# Altium PCB FreeJoy Controller Lite.PcbDoc
Units mm, origin at the board's own origin, x right, y up, seen from the top; angles counter-clockwise.
Board outline 60 x 30 mm, 2 copper layers (Top Layer, Bottom Layer), stack 1.036 mm thick; 47 components, 50 nets, 225 pads, 77 vias.
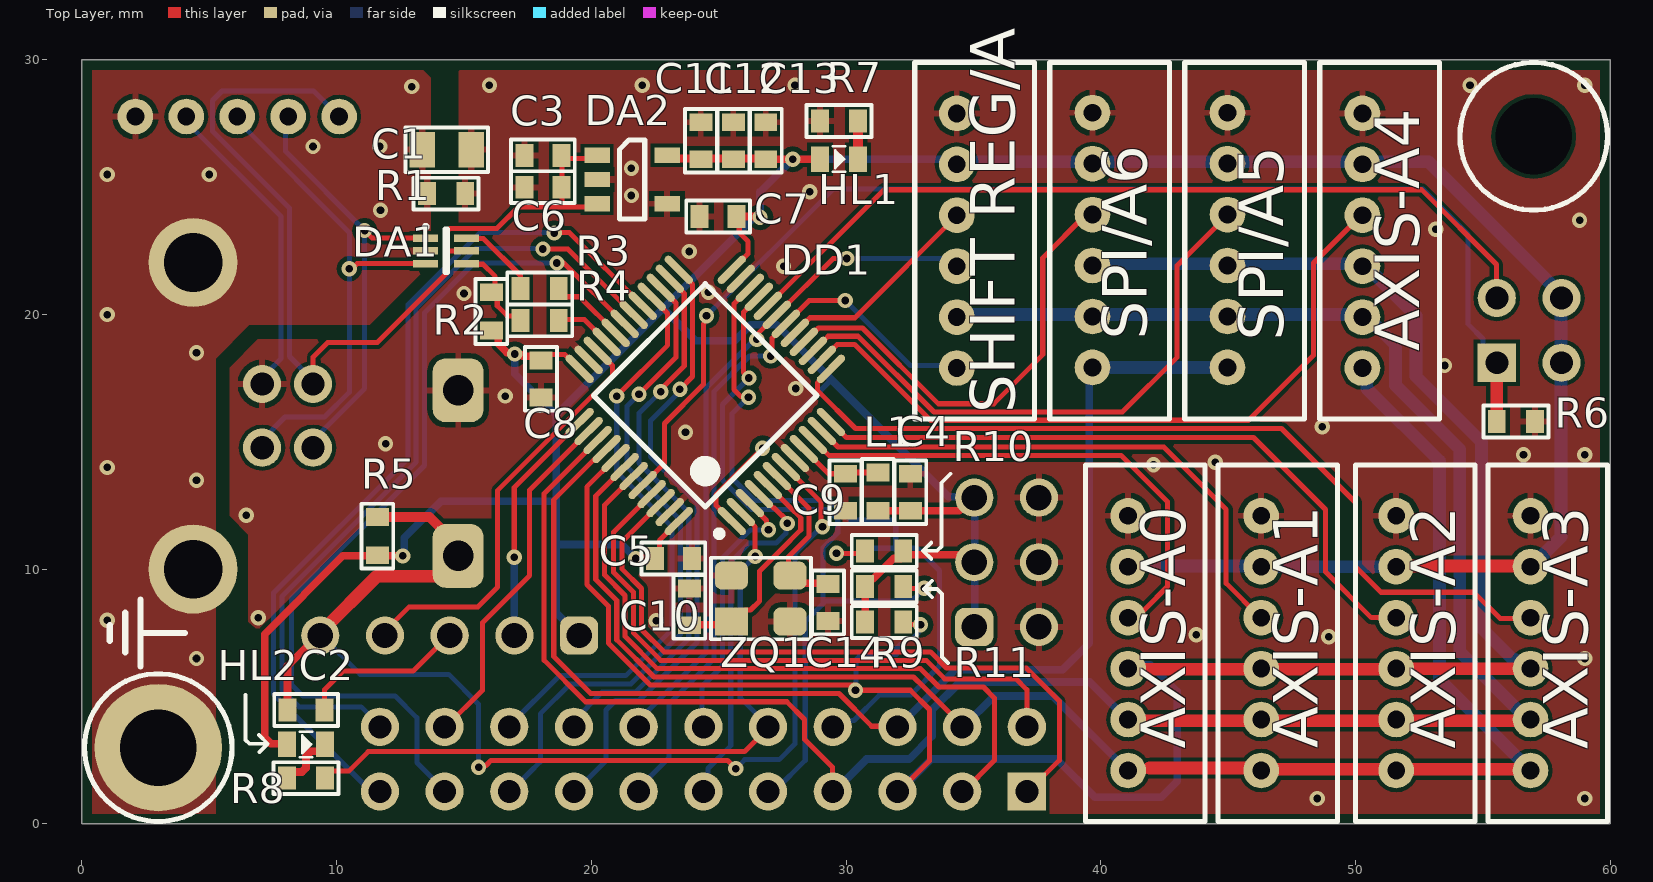
[diagram p0: Top Layer view]
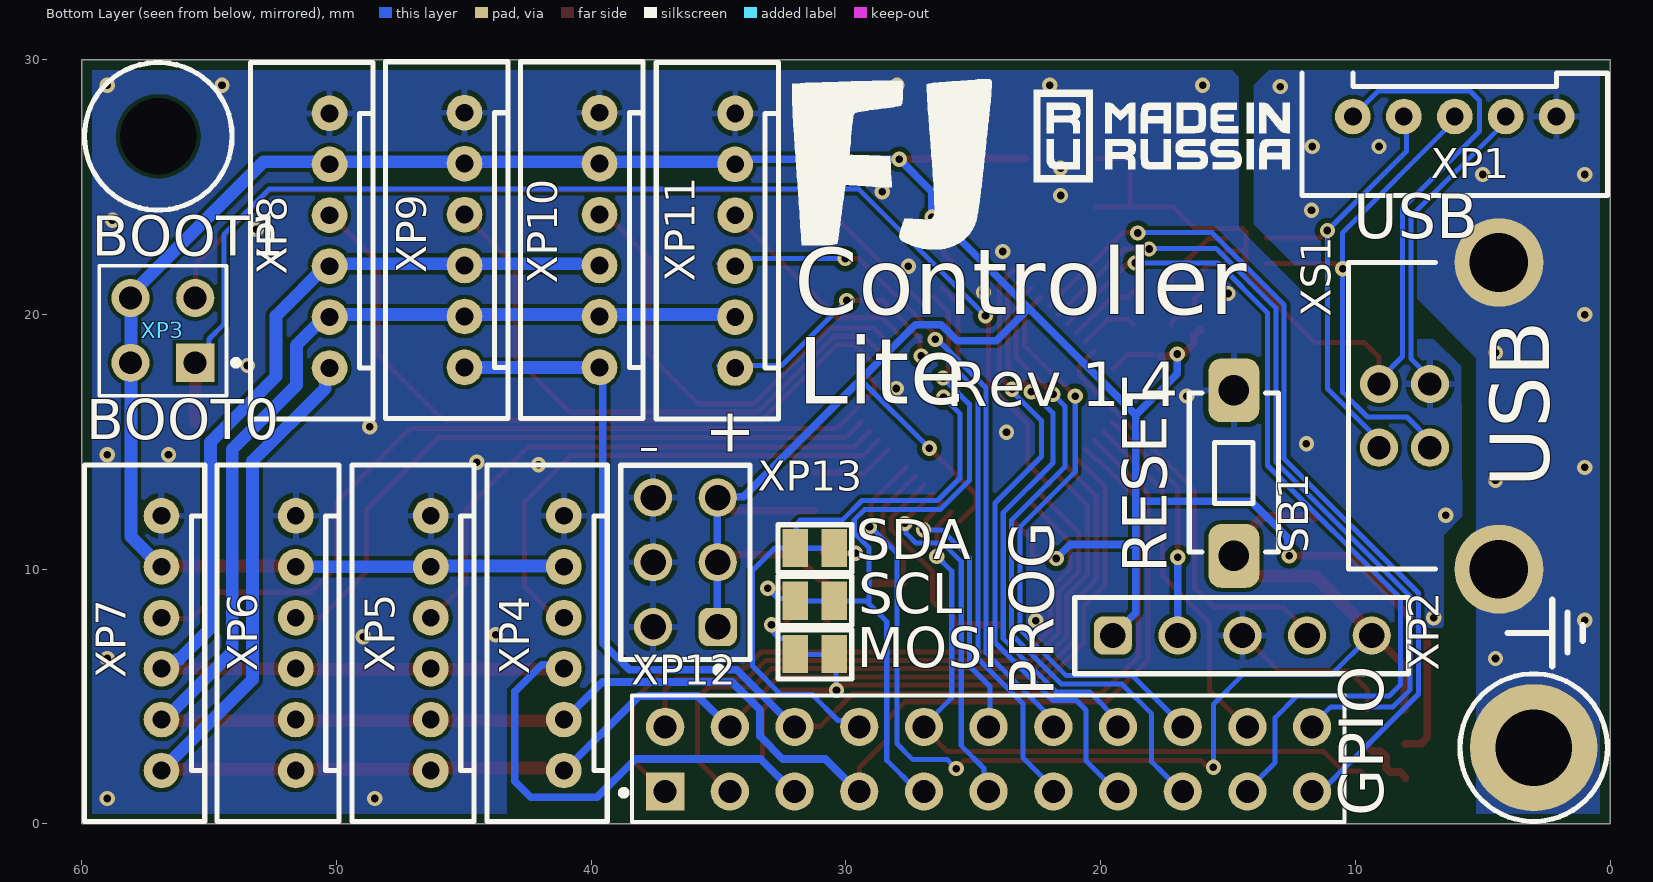
[diagram p1: Bottom Layer view, seen from below]

## Layer stack, top to bottom
Top Solder: solder mask 0.0254, SM-001, Dk 4
Top Layer: signal copper 0.018
Dielectric 1: core 1, Core-043, Dk 4.3
Bottom Layer: signal copper 0.018
Bottom Solder: solder mask 0.0254, SM-001, Dk 4

## Board outline
0,0 60,0 60,30 0,30

## Design rules (kind name [scope] priority, off if disabled: settings)
BoardOutlineClearance BoardOutlineClearance_Silk [OnLayer('Top Overlay')  or OnLayer('Bottom Overlay')] p1: gap=0 ignorepadtopadclearanceinfootprint=FALSE
BoardOutlineClearance [All] p2: gap=0.4 ignorepadtopadclearanceinfootprint=FALSE
Clearance [All] p1: gap=0.125 ignorepadtopadclearanceinfootprint=FALSE except(0: Arc-Hole Track-Hole SMDPad-Hole THPad-Hole Via-Hole Fill-Hole Poly-Hole Region-Hole Text-Hole; 0.15: Arc-Poly Track-Poly SMDPad-Poly THPad-Poly Fill-Poly Poly-Poly; 0.2: Arc-Arc Arc-Track Arc-SMDPad Arc-THPad Arc-Via Arc-Fill Arc-Region Arc-Text Via-Poly)
ComponentClearance [All] p1: gap=-0.05 collisioncheckmode=3 verticalgap=0.1 showdistances=FALSE
DiffPairsRouting [All] p1: maxlimit=0.15 minlimit=0.125 mostfreqgap=0.125 toplayer_minwidth=0.125 toplayer_maxwidth=1.2 toplayer_prefwidth=0.125 bottomlayer_minwidth=0.125 bottomlayer_maxwidth=1.2 bottomlayer_prefwidth=0.125 maxuncoupledlength=12.7
Height [All] p1: minheight=0 maxheight=50 prefheight=10
HoleSize [All] p1: absolutevalues=TRUE maxlimit=5 minlimit=0.3 maxpercent=80.000 minpercent=20.000
HoleToHoleClearance [All] p1: gap=0.3 allowstackedmicrovias=TRUE
MinimumAnnularRing AnnularRingVia [IsVia] p1: minimumring=0.15
MinimumAnnularRing [All] p2: minimumring=0.2
MinimumSolderMaskSliver [All] p1: minsoldermaskwidth=0.05
PlaneClearance [All] p1: clearance=0.4
PlaneConnect [All] p1: planeconnectstyle=Relief reliefexpansion=0.4 reliefentries=4 reliefconductorwidth=0.2 reliefairgap=0.2
PolygonConnect PolygonConnectMountingHole [IsPad and HoleDiameter>=2] p1: connectstyle=Direct reliefconductorwidth=0.254 reliefentries=4 polygonreliefangle="90 Angle" airgapwidth=0.254
PolygonConnect PolygonConnectVia [All vs IsVia] p2: connectstyle=Direct reliefconductorwidth=0.2 reliefentries=4 polygonreliefangle="90 Angle" airgapwidth=0.2
PolygonConnect [All] p3: connectstyle=Relief reliefconductorwidth=0.25 reliefentries=4 polygonreliefangle="90 Angle" airgapwidth=0.2
RoutingVias [All] p1: holewidth=0.3 width=0.6 viastyle="Through Hole" minholewidth=0.3 minwidth=0.6 maxholewidth=2 maxwidth=3
SilkToSilkClearance [All] p1: silktosilkclearance=0
SilkToSolderMaskClearance [IsPad] p1: minsilkscreentomaskgap=0.001 clearancetoexposedcopper=FALSE
SolderMaskExpansion SolderMaskExpansion_isVia [IsVia] p1: expansion=0.102 istentingtop=TRUE
SolderMaskExpansion [All] p2: expansion=0.05 istentingtop=FALSE
Width [All] p1: maxlimit=5 minlimit=0.125 preferedwidth=0.2 minimp=50.000000 maximp=50.000000 favimp=50.000000
Width Width_Arc [IsArc] p2: maxlimit=5 minlimit=0.2 preferedwidth=0.2 minimp=50.000000 maximp=50.000000 favimp=50.000000
20 further rules are at their usual default settings.

## Components (designator, comment, footprint, x,y, rotation, side; value= is the part's Value field where it differs from the comment)
C1 "4.7nF 250V" CC0805_HD 14.325,26.475 r180 top value="Конденсатор 0805 250 В 4,7 нФ ±10% X7R"
C2 "100nF" CC0603_HD 8.8,4.475 r180 top value=0,1uF
C3 "1uF" CC0603_HD 18.1,26.25 r0 top value="Конденсатор 0603 6,3 В 1 мкФ ±10% X5R"
C4 "1uF" CC0603_HD 32.525,13.025 r90 top value="Конденсатор 0603 6,3 В 1 мкФ ±10% X5R"
C5 "100nF" CC0603_HD 23.225,10.425 r180 top value=0,1uF
C6 "100nF" CC0603_HD 18.1,25 r0 top value=0,1uF
C7 "100nF" CC0603_HD 24.975,23.85 r0 top value=0,1uF
C8 "100nF" CC0603_HD 18.025,17.475 r90 top value=0,1uF
C9 "100nF" CC0603_HD 29.975,13.025 r270 top value=0,1uF
C10 "22pF" CC0603_HD 23.85,8.525 r270 top value="Конденсатор 0603 50В 22 пФ ±5% NP0"
C11 "1uF" CC0603_HD 24.3,26.825 r270 top value="Конденсатор 0603 6,3 В 1 мкФ ±10% X5R"
C12 "100nF" CC0603_HD 25.575,26.825 r270 top value=0,1uF
C13 "22pF" CC0603_HD 26.85,26.825 r270 top value="Конденсатор 0603 50В 22 пФ ±5% NP0"
C14 "22pF" CC0603_HD 29.3,8.7 r90 top value="Конденсатор 0603 50В 22 пФ ±5% NP0"
DA1 "USBLC6-2P6" SOT666 14.3,22.5 r0 top value="Диодная сборка USBLC6-2SC6"
DA2 "LP5907MFX-3.3" SOT23-5 21.6,25.3 r0 top
DD1 "STM32F103C8T6" LQFP48 24.475,16.825 r135 top
HL1 "KP-1608SRC" LED0603R_HD 28.925,26.1 r0 top value="Светодиод KP-1608SRC"
HL2 "KP-1608SGC" LED0603G_HD 8,3.125 r0 top value="Светодиод KP-1608SGC"
L1 "Ferrite bead, BLM18HG102SN1D" RC0603_HD 31.25,13.05 r90 top
R1 "1M" RC0603_HD 14.3,24.75 r180 top value="Резистор 0603"
R2 "1K5" RC0603_HD 16.075,20.125 r270 top value="Резистор 0603"
R3 "27R" RC0603_HD 17.975,21.025 r0 top value="Резистор 0603"
R4 "27R" RC0603_HD 17.975,19.775 r0 top value="Резистор 0603"
R5 "4K7" RC0603_HD 11.6,11.3 r90 top value="Резистор 0603"
R6 "4K7" RC0603_HD 56.3,15.8 r0 top value="Резистор 0603"
R7 "4K7" RC0603_HD 29.725,27.6 r180 top value="Резистор 0603"
R8 "4K7" RC0603_HD 8.8,1.8 r180 top value="Резистор 0603"
R9 "1К" RC0603_HD 31.5,7.925 r180 top value="Резистор 0603"
R10 "4K7" RC0603_HD 31.5,10.725 r180 top value="Резистор 0603"
R11 "4K7" RC0603_HD 31.5,9.325 r0 top value="Резистор 0603"
SB1 "Tact Switch 3.5x6mm THT" DTS-32 14.775,13.775 r270 bottom
XP1 "USB PH2.0-5P" PH2.0-5P 10.1,27.775 r180 bottom value="Гнездо PBS-12"
XP2 "PROG" PLS-5 19.52,7.4 r180 bottom value="Вилка PLS-10"
XP3 "BOOT" PLD-4 55.55,18.11 r90 bottom value="Вилка PLD-4"
XP4 "AXIS-A0" PH2.0-6P 41.075,12.1 r270 bottom value="Гнездо PBS-12"
XP5 "AXIS-A1" PH2.0-6P 46.3,12.1 r270 bottom value="Гнездо PBS-12"
XP6 "AXIS-A2" PH2.0-6P 51.6,12.1 r270 bottom value="Гнездо PBS-12"
XP7 "AXIS-A3" PH2.0-6P 56.875,12.1 r270 bottom value="Гнездо PBS-12"
XP8 "AXIS-A4" PH2.0-6P 50.275,27.9 r270 bottom value="Гнездо PBS-12"
XP9 "SPI/A5" PH2.0-6P 44.975,27.925 r270 bottom value="Гнездо PBS-12"
XP10 "SPI/A6" PH2.0-6P 39.675,27.925 r270 bottom value="Гнездо PBS-12"
XP11 "SHIFT REG/A7" PH2.0-6P 34.35,27.9 r270 bottom value="Гнездо PBS-12"
XP12 "GPIO" PLD-22 37.1,1.275 r180 bottom value="Вилка PLD-22"
XP13 "SUPPLY" PLD-6 35.035,7.735 r90 bottom value="Вилка PLD-6"
XS1 "USB Type B" DS1099-B 4.365,10.005 r90 bottom
ZQ1 "KX-7T 8MHz" CRYSTAL_3225 26.65,8.85 r0 top value="Кварцевый резонатор MJ-8.000-12"

## Footprints (in the part's own frame and the unit in brackets; to place one, negate y for a bottom-side part, rotate by r counter-clockwise, add the part's x,y. Pads: shape width x height; smd on the part's side, far side on the other; paste and mask are expansions set on the pad)
CC0603_HD [mm]
  rect 0.7x0.9 smd: 1(-0.725,0) 2(0.725,0)
  silkscreen extent -1.25,-0.63 1.25,0.63, body extent -0.82,-0.4 0.78,0.4, height 0.8
CC0805_HD [mm]
  rect 1x1.4 smd: 1(-0.965,0) 2(0.965,0)
  silkscreen extent -1.63,-0.87 1.63,0.87, body extent -1,-0.62 1,0.63, height 0.6
CRYSTAL_3225 [mm]
  rect 1.3x1.1 smd: 1(-1.15,-0.9)
  rrect50% 1.3x1.1 smd: 2(1.15,0.9) 3(-1.15,0.9) 3(1.15,-0.9)
  silkscreen extent -1.95,-1.6 1.97,1.6, body extent -1.6,-1.2 1.6,1.3, height 0.6
DS1099-B [mm] "USB Type B socket"
  round 1.5 hole 0.92: 1(7.27,4.71) 2(4.77,4.71) 3(4.77,2.71) 4(7.27,2.71)
  round 3.5 hole 2.3: 5(0,0) 5(12.04,0)
  silkscreen extent 0,2.5 12.04,5.9, body extent -1.39,-10.2 13.39,5.9, height 10.76
DTS-32 [mm]
  rrect50% 2.5x2 hole 1.2: 1(-3.25,0) 2(3.25,0)
  silkscreen extent -3.15,-1.75 3.1,1.75, body extent -3.88,-1.75 3.88,1.75, height 5
LED0603G_HD [mm]
  rect 0.7x1 smd: A(0.05,0) C(1.55,0)
  silkscreen extent 0.55,-0.5 1.05,0.5, body extent 0,-0.4 1.6,0.4, height 0.6
LED0603R_HD [mm]
  rect 0.7x1 smd: A(0.05,0) C(1.55,0)
  silkscreen extent 0.55,-0.5 1.05,0.5, body extent 0,-0.4 1.6,0.4, height 0.6
LQFP48 [mm] "TSQFP, 48-Leads, Body 7,00x7,00mm, Pitch 0,50mm, IPC Medium Density"
  oval 1.45x0.3 smd: 1(-4.225,2.75) 2(-4.225,2.25) 3(-4.225,1.75) 4(-4.225,1.25) 5(-4.225,0.75) 6(-4.225,0.25) 7(-4.225,-0.25) 8(-4.225,-0.75) 9(-4.225,-1.25) 10(-4.225,-1.75) 11(-4.225,-2.25) 12(-4.225,-2.75) 25(4.225,-2.75) 26(4.225,-2.25) 27(4.225,-1.75) 28(4.225,-1.25) 29(4.225,-0.75) 30(4.225,-0.25) 31(4.225,0.25) 32(4.225,0.75) 33(4.225,1.25) 34(4.225,1.75) 35(4.225,2.25) 36(4.225,2.75)
  oval 0.3x1.45 smd: 13(-2.75,-4.225) 14(-2.25,-4.225) 15(-1.75,-4.225) 16(-1.25,-4.225) 17(-0.75,-4.225) 18(-0.25,-4.225) 19(0.25,-4.225) 20(0.75,-4.225) 21(1.25,-4.225) 22(1.75,-4.225) 23(2.25,-4.225) 24(2.75,-4.225) 37(2.75,4.225) 38(2.25,4.225) 39(1.75,4.225) 40(1.25,4.225) 41(0.75,4.225) 42(0.25,4.225) 43(-0.25,4.225) 44(-0.75,4.225) 45(-1.25,4.225) 46(-1.75,4.225) 47(-2.25,4.225) 48(-2.75,4.225)
  silkscreen extent -4.35,-3.1 3.1,3.57, body extent -4.5,-4.5 4.5,4.5, height 1.6
PH2.0-5P [mm]
  round 1.4 hole 0.7: 1(0,0) 2(2,0) 3(4,0) 4(6,0) 5(8,0)
  silkscreen extent -2,-3.1 10,1.7, body extent -2,-3.1 10,1.7, height 6
PH2.0-6P [mm]
  round 1.4 hole 0.7: 1(0,0) 2(2,0) 3(4,0) 4(6,0) 5(8,0) 6(10,0)
  silkscreen extent -2,-3.02 12,1.7, body extent -2,-3.1 12,1.7, height 6
PLD-4 [mm]
  rect 1.5x1.5 hole 0.9: 1(0,0)
  round 1.5 hole 0.9: 2(0,2.54) 3(2.54,0) 4(2.54,2.54)
  silkscreen extent -1.3,-1.7 3.81,3.77, body extent -1.27,-1.25 3.81,3.75, height 8.4
PLD-6 [mm]
  rrect50% 1.5x1.5 hole 1: 1(0,0)
  round 1.5 hole 1: 2(0,2.54) 3(2.54,0) 4(2.54,2.54) 5(5.08,0) 6(5.08,2.54)
  silkscreen extent -1.78,-1.27 6.35,3.81, body extent -1.27,-1.23 6.35,3.77, height 8.6
PLD-22 [mm]
  rect 1.5x1.5 hole 0.9: 1(0,0)
  round 1.5 hole 0.9: 2(0,2.54) 3(2.54,0) 4(2.54,2.54) 5(5.08,0) 6(5.08,2.54) 7(7.62,0) 8(7.62,2.54) 9(10.16,0) 10(10.16,2.54) 11(12.7,0) 12(12.7,2.54) 13(15.24,0) 14(15.24,2.54) 15(17.78,0) 16(17.78,2.54) 17(20.32,0) 18(20.32,2.54) 19(22.86,0) 20(22.86,2.54) 21(25.4,0) 22(25.4,2.54)
  silkscreen extent -1.73,-1.2 26.67,3.77, body extent -1.27,-1.2 26.67,3.8, height 8.4
PLS-5 [mm]
  rrect50% 1.5x1.5 hole 1: 1(0,0)
  round 1.5 hole 1: 2(2.54,0) 3(5.08,0) 4(7.62,0) 5(10.16,0)
  silkscreen extent -1.5,-1.5 11.6,1.5, body extent -1.27,-1.27 11.43,1.27, height 8.44
RC0603_HD [mm]
  rect 0.7x0.9 smd: 1(-0.75,0) 2(0.75,0)
  silkscreen extent -1.28,-0.63 1.28,0.63, body extent -0.8,-0.4 0.8,0.4, height 0.45
SOT23-5 [mm]
  rect 1x0.6 smd: 1(-1.375,0.95) 2(-1.375,0) 3(-1.375,-0.95) 4(1.375,-0.95) 5(1.375,0.95)
  silkscreen extent -0.5,-1.55 0.5,1.55, body extent -1.27,-1.5 1.23,1.5, height 1.05
SOT666 [mm] "SOTFL, 6-Leads, Body 1.60x1.60mm, Pitch 0.50mm, IPC High Density"
  rect 0.99x0.3 smd: 1(-0.805,0.5) 2(-0.805,0) 3(-0.805,-0.5) 4(0.805,-0.5) 5(0.805,0) 6(0.805,0.5)
  silkscreen extent -0.85,-0.85 0.05,1, body extent -0.8,-0.8 0.8,0.8, height 0.6

## Part data
C1: library part "Конденсатор 0805 250 В 4,7 нФ ±10% X7R", "4700pF ± 5%, 250V, X7R, SMD 0805"
C2 C5 C6 C7 C8 C9 C12: library part "Конденсатор 0603 50 В 0,1 мкФ ±10% X7R", "0.1uF ± 10%, 25V, X7R, SMD 0603"
C3 C4 C11: library part "Конденсатор 0603 16 В 1 мкФ ±10% X7R", "1uF ± 10%, 16V, X7R, SMD 0603"
C10 C13 C14: library part "Конденсатор 0603 50В 22 пФ ±5% NP0", "22pF ± 5%, 50V, NPO, SMD 0603"
DA1: library part "Диодная сборка USBLC6-2P6", "ESR protection IC, USBLC6-2P6, SOT666"
DA2: library part "Микросхема LP5907MFX-3.3", "LDO voltage regulator, LP5907MFX-3.3, SOT23-5"
DD1: library part "Микросхема STM32F103C8T6", "MCU, STM32F103C8T6, LQFP48"
HL1: library part "Светодиод KP-1608SRC", "KP-1608SRC, LED red, SMD 0603"
HL2: library part "Светодиод KP-1608SGC", "KP-1608SGC, LED green, SMD 0603"
L1: library part "Индуктивность BLM18HG102SN1D", "BLM18HG102SN1D, SMD 0603"
R1: library part "Резистор RC0603FR-071ML", "1M ± 1%, SMD 0603"
R2: library part "Резистор RC0603FR-071K5L", "1K5 ± 1%, SMD 0603"
R3 R4: library part "Резистор RC0603FR-0727RL", "27R ± 1%, SMD 0603"
R5 R6 R7 R8 R10 R11: library part "Резистор RC0603FR-074K7L", "4K7 ± 1%, SMD 0603"
R9: library part "Резистор RC0603FR-071KL", "1K ± 1%, SMD 0603"
SB1: library part "Кнопка DTS-32", "DTS-32, 3.5x6mm, THT"
XP1: library part "Вилка PH2.0-5P", "PH2.0-5P"
XP2: library part "Вилка DS1021-1x5", "PLS-5"
XP3: library part "Вилка DS1021-2x2", "PLD-4"
XP4 XP5 XP6 XP7 XP8 XP9 XP10 XP11: library part "Вилка PH2.0-6P", "PH2.0-6P"
XP12: library part "Вилка DS1021-2x11", "PLD-22"
XP13: library part "Вилка DS1021-2x3", "PLD-6"
XS1: library part "Гнездо DS1099", "DS1099, USB Type B Socket"
ZQ1: library part "Кварцевый резонатор KX-7T 8 МГц", "Crystal Resonator, 8MHz, KX-7T"

## Free pads (board coordinates)
  round 5 hole 3: ""(3,3)
  rect 1x1.5 smd far side: ""(30.463,6.675) ""(30.463,8.762) ""(30.463,10.838) ""(31.988,6.675) ""(31.988,8.762) ""(31.988,10.838)
  round 1.4 hole 3 unplated: ""(57,27)

## Via types
v1: diameter 0.6, hole 0.3, Top Layer to Bottom Layer, tented both sides, 77 vias

## Nets (pads, with @x,y where several pads share a name; then routed paths per layer and width w, separated by ;. In a path a pad name is that pad's centre, name@x,y a point inside that pad or via, vN(x,y) a via of type N, cw(c..) or ccw(c..) an arc to the next point about the centre after c; other vN are vias at no path point)
3V3: C4.1 C5.2 C7.2 C8.2 C11.2 C12.2 C13.2 DA2.5 DD1.1 DD1.24 DD1.36 DD1.48 HL1.A HL2.A L1.1 R2.2 R5.1 R9.2 R10.1 R11.1 XP2.1 XP3.2 XP3.4 XP4.2 XP5.2 XP6.2 XP7.2 XP8.2 XP9.2 XP10.2 XP11.2 XP13.1 XP13.3 XP13.5 | length 163.2
  Top Layer w0.2: C8.2@17.975,18.425 18.969,18.425 19.526,17.868 DD1.36 ; C5.2@22.675,10.425 22.675,11.136 DD1.48 ; DD1.1 24.9,12.511 24.9,12.924 v1(26.725,14.75) ; DD1.24 26.15,22.389 26.15,22.875 25.808,23.217 25.808,23.742 C7.2
  Top Layer w0.3: HL2.A 8.026,3.149 7.426,3.149 7.175,3.4 7.175,7.45 10.25,10.525 v1(12.6,10.525) ; R2.2 16.15,19.375 16.35,19.175 16.35,18.85 16.693,18.507 ; v1(17,18.45) 17.025,18.425 17.263,18.425 17.319,18.369 C8.2@17.681,18.369 ; v1(21.75,10.425) C5.2@22.675,10.425 ; DA2.5@22.975,26.125 26.825,26.125 C13.2 v1(27.912,26.1) HL1.A ; C7.2 26.6,23.85 v1(26.625,23.825) ; R9.2 R11.1 30.75,9.425 30.95,9.625 31.075,9.625 31.875,10.425 32.15,10.425 R10.1@32.225,10.5 ; L1.1 C4.1 34.45,12.3 34.965,12.815 XP13.5 XP13.5@35.16,12.815 ; R10.1 32.4,10.575 34.41,10.575 34.481,10.505 34.78,10.505 XP13.3@34.85,10.575 ; XP13.3@34.805,10.045 XP13.3
  Top Layer w0.5: XP13.1@34.67,8.1 XP13.1 ; XP6.2@51.502,10.125 56.85,10.125 XP7.2 ; XP3.2@57.95,18.225 XP3.2@58.075,18.35
  Bottom Layer w0.2: v1(26.725,14.75) 29.388,17.413 29.463,17.413
  Bottom Layer w0.3: v1(12.6,10.525) 12.657,10.582 12.657,11.232 14.1,12.675 18.625,12.675 ; v1(17,18.45) 17,17.683 18.625,16.058 ; XP2.1 18.625,8.295 18.625,10.975 ; v1(21.75,10.425) 21.2,10.975 18.625,10.975 ; XP11.2@35,26 34.9,26.1 v1(27.912,26.1) 27.9,26.1 26.625,24.825 v1(26.625,23.825) 26.568,23.768 26.335,23.768 22.821,20.254 ; XP13.1 35.05,7.75 35.05,10.26 XP13.3 35.05,10.29 35.05,12.8 XP13.5 35,12.85 34.025,12.85 29.463,17.413 27.275,19.6 26.262,19.6 25.637,18.975 24.1,18.975 22.821,20.254 ; 18.625,10.975 18.625,12.675 ; 18.625,12.675 18.625,16.058 ; 18.625,16.058 22.821,20.254
  Bottom Layer w0.5: XP11.2@35,26 39.675,26 44.975,26 50.275,26 52.875,26 57.985,20.89 58.075,20.89 58.075,18.11 58.075,11.275 56.9,10.1 XP7.2 ; XP4.2@41.678,10.125 46.275,10.125 XP5.2 XP6.2
A0: DD1.10 XP4.3 | length 20.4
  Top Layer w0.2: DD1.10 28.727,15.075 29.327,14.475 40.8,14.475 42.625,12.65 42.625,9.325 41.745,8.445 41.35,8.05 XP4.3@41,8.05
A1: DD1.11 XP5.3 | length 22
  Top Layer w0.2: DD1.11 29.682,14.8 42.475,14.8 44.925,12.35 44.925,9.45 46.275,8.1 XP5.3
A2: DD1.12 XP6.3 | length 26.8
  Top Layer w0.2: DD1.12 30.014,15.175 46,15.175 48.825,12.35 48.825,9.9 50.625,8.1 XP6.3
A3: DD1.13 XP7.3 | length 34.3
  Top Layer w0.2: DD1.13 29.407,17.841 28.875,17.309 28.875,17.025 30.375,15.525 47.1,15.525 50,12.625 50,10.1 51,9.1 54.65,9.1 55.675,8.075 56.85,8.075 XP7.3
A4: DD1.14 XP8.3 | length 28.3
  Top Layer w0.2: DD1.14 29.657,18.825 30.34,18.825 33.315,15.85 45.8,15.85 48.35,18.4 48.35,22.025 XP8.3@50.375,24.05
A5: DD1.15 XP9.3 | length 23.1
  Top Layer w0.2: DD1.15 28.727,18.575 29.302,19.15 30.475,19.15 33.45,16.175 40.85,16.175 43,18.325 43,21.925 44.975,23.9 XP9.3
A6: DD1.16 XP10.3 | length 18.1
  Top Layer w0.2: DD1.16 28.373,18.929 28.92,19.475 30.65,19.475 33.625,16.5 35.8,16.5 37.725,18.425 37.725,22.225 39.425,23.925 XP10.3
A7: DD1.17 XP11.3 | length 8.4
  Top Layer w0.2: DD1.17 28.586,19.875 30.35,19.875 XP11.3@34.45,23.975
A8: DD1.29 XP12.21 | length 34.9
  Top Layer w0.2: v1(18.551,23.201) 18.575,23.225 19.136,23.225 DD1.29
  Bottom Layer w0.2: XP12.21@11.75,1.275 11.35,1.275 7.525,5.1 7.525,9.069 12.8,14.344 12.8,20.385 15.64,23.225 18.527,23.225 v1(18.551,23.201)
A9: DD1.30 XP12.22 | length 32.3
  Top Layer w0.2: v1(18.101,22.576) 19.077,22.576 DD1.30
  Bottom Layer w0.2: XP12.22@11.75,3.815 10.965,4.6 8.525,4.6 7.85,5.275 7.85,8.935 13.125,14.21 13.125,20.25 15.475,22.6 18.077,22.6 v1(18.101,22.576)
A10: DD1.31 XP12.19 | length 35.3
  Top Layer w0.2: v1(18.65,22.025) 18.921,22.025 DD1.31
  Bottom Layer w0.2: XP12.19@14.29,1.275 13.15,2.415 13.15,4.175 12.3,5.025 8.675,5.025 8.225,5.475 8.225,8.85 13.45,14.075 13.45,20.075 15.4,22.025 v1(18.65,22.025)
A15: DD1.38 XP12.20 | length 13.9
  Top Layer w0.2: XP12.20@14.29,3.815 15.725,5.25 15.725,7.9 17.575,9.75 17.575,13.107 DD1.38
B0: DD1.18 XP11.6 XP12.13 | length 30
  Top Layer w0.2: v1(27.05,18.375) 27.1,18.425 27.1,19.069 27.639,19.609 DD1.18 28.554,20.55 v1(29.975,20.55)
  Bottom Layer w0.2: XP12.13@21.8,1.35 22.525,2.075 23.05,2.6 23.05,4.725 24.825,6.5 24.825,16.985 26.215,18.375 v1(27.05,18.375) ; v1(29.975,20.55) 32.525,18 XP11.6@35,18
B1: DD1.19 XP11.4 XP12.14 | length 26.9
  Top Layer w0.2: v1@26.5,19.204 DD1.19 29.496,22.2 v1(30.025,22.2)
  Bottom Layer w0.2: XP12.14@21.9,3.9 21.9,4.125 24.5,6.725 24.5,17.12 26.405,19.025 v1(26.5,19.025) ; v1(30.025,22.2) 34.8,22.2 XP11.4@35,22
B3: DD1.39 XP4.5 XP5.5 XP6.5 XP7.5 XP8.5 XP9.5 XP10.5 XP11.5 XP12.7 | length 88
  Top Layer w0.2: DD1.39 18.15,12.975 18.15,6.425 19.775,4.8 22.056,4.8 27.675,4.8 28.375,4.1 28.375,3.325 29.467,2.233 29.467,1.338 XP12.7@29.53,1.275
  Top Layer w0.5: XP4.5@41.762,4.05 46.25,4.05 XP5.5 46.35,4.05 51.55,4.05 XP6.5 51.65,4.05 56.825,4.05 XP7.5
  Bottom Layer w0.3: XP12.7@29.53,1.275 30.805,2.55 32.475,2.55 33.375,3.45 33.375,4.475 34.475,5.575 39.575,5.575 XP4.5@41.209,3.941
  Bottom Layer w0.5: XP11.5@35,20 39.675,20 44.975,20 46,20 50.375,20 51.575,18.8 51.575,17.225 54.1,14.7 54.1,6.75 56.75,4.1 XP7.5
B4: DD1.40 XP9.6 XP10.6 XP12.6 | length 48.8
  Top Layer w0.2: DD1.40 20.178,14.296 20.095,14.296 18.525,12.725 18.525,6.575 19.975,5.125 22.19,5.125 29.725,5.125 31.012,3.838 XP12.6@32.047,3.838
  Bottom Layer w0.3: XP12.6@32.07,3.815 32.07,3.83 34.29,6.05 38.5,6.05 39.55,7.1 39.55,17.8 XP10.6
  Bottom Layer w0.5: XP10.6 44.725,17.925 XP9.6@44.825,18.025 ; XP9.6@44.875,18.025 XP9.6
B5: DD1.41 pad.@30.463,6.675 pad.@31.988,6.675 R9.1 XP4.4 XP5.4 XP6.4 XP7.4 XP8.4 XP9.4 XP10.4 XP12.5 | length 92.4
  Top Layer w0.2: DD1.41 19.825,13.236 19.825,9.4 20.675,8.55 20.675,7.1 22.325,5.45 30.383,5.45 30.558,5.275 v1@30.533,5.25 ; v1(30.375,5.25) v1@30.533,5.25 ; XP12.5@32.07,1.275 33.275,2.48 33.275,4.5 32.525,5.25 v1@30.533,5.25 ; R9.1@32.15,8.125 32.45,7.825 v1(32.925,7.825)
  Top Layer w0.5: 41.782,6.075 46.275,6.075 XP5.4 46.325,6.075 51.575,6.075 XP6.4 XP7.4
  Bottom Layer w0.2: v1(30.375,5.25) 30.4,5.275 30.4,6.463 pad.@30.588,6.65 ; pad.@30.638,6.65 pad.@31.963,6.65 ; pad.@31.988,6.65 31.988,6.887 32.388,7.287 32.625,7.287 32.848,7.511 32.848,7.723 v1@32.95,7.825
  Bottom Layer w0.3: XP12.5@32.07,1.275 33.345,2.55 38.275,2.55 39.775,1.05 42.375,1.05 43,1.675 43,5.2 41.95,6.25 XP4.4@41.75,6.25
  Bottom Layer w0.5: 40.5,22 50.325,22 52.375,19.95 52.375,17.575 54.95,15 54.95,7.7 56.187,6.463 56.269,6.463 56.631,6.1 XP7.4
B6: DD1.42 XP4.6 XP5.6 XP6.6 XP7.6 XP8.6 XP12.4 | length 64.7
  Top Layer w0.2: DD1.42 20.175,12.879 20.175,9.6 21,8.775 21,7.235 22.46,5.775 32.65,5.775 33.05,5.375 XP12.4@34.61,3.815
  Top Layer w0.5: 41.916,2.2 46.2,2.2 XP5.6 46.35,2.15 51.55,2.15 XP6.6 51.65,2.15 56.825,2.15 XP7.6
  Bottom Layer w0.3: XP12.4@34.61,3.815 35.82,5.025 38.125,5.025 XP4.6@41.253,1.897
  Bottom Layer w0.5: XP8.6 50.447,17.728 50.447,17.103 53.3,14.25 53.3,5.675 XP7.6
B7: DD1.43 XP12.3 | length 26.8
  Top Layer w0.2: DD1.43 20.525,12.521 20.525,9.775 21.325,8.975 21.325,7.369 22.594,6.1 32.925,6.1 33.65,5.375 35.4,5.375 35.825,4.95 35.825,2.49 XP12.3@34.61,1.275
B8: DD1.45 XP12.2 | length 24.2
  Top Layer w0.2: DD1.45 20.875,11.457 20.875,9.885 21.65,9.11 21.65,7.504 22.729,6.425 33.15,6.425 33.875,5.7 36.675,5.7 37.1,5.275 XP12.2@37.1,3.865
B9: DD1.46 XP12.1 | length 27.5
  Top Layer w0.2: DD1.46 21.2,11.075 21.2,10.019 21.975,9.244 21.975,7.638 22.863,6.75 33.325,6.75 33.95,6.125 37.075,6.125 38.375,4.825 38.375,2.5 XP12.1@37.15,1.275
B10: DD1.21 pad.@30.463,8.762 pad.@31.988,8.762 R11.2 XP12.9 | length 30
  Top Layer w0.2: v1(26.189,17.511) 25.975,17.725 25.975,20.093 DD1.21 ; R11.2@32.3,9.325 32.375,9.25 v1(33.075,9.25) ; R11.2@32.325,9.425 32.4,9.35 R11.2@32.425,9.375
  Bottom Layer w0.2: v1(26.189,17.511) 25.15,16.473 25.15,13.5 26.3,12.35 29.265,12.35 29.675,11.94 29.675,11.425 29.1,10.85 29.1,8.65 ; XP12.9@26.925,1.35 27.25,1.35 28.4,2.5 28.4,7.95 29.1,8.65 ; pad.@30.5,8.75 29.2,8.75 29.1,8.65 ; pad.@30.675,8.75 pad.@31.888,8.75 ; pad.@31.988,8.762 32.07,8.845 32.67,8.845 v1(33.075,9.25) ; pad.@32.075,8.75 pad.@32.1,8.775 ; pad.@32.112,8.762 pad.@32.15,8.725
B11: DD1.22 pad.@30.463,10.838 pad.@31.988,10.838 R10.2 XP12.8 | length 31
  Top Layer w0.2: v1(26.173,16.754) 26.151,16.776 25.875,16.776 25.6,17.051 25.6,20.425 DD1.22 ; v1(29.625,10.625) 30.925,10.625 R10.2@30.95,10.65
  Bottom Layer w0.2: v1(26.173,16.754) 25.525,16.105 25.525,13.585 26.41,12.7 29.375,12.7 30.15,11.925 31.8,11.925 31.955,11.77 31.955,10.87 pad.@31.988,10.838 ; XP12.8@29.375,3.9 29.539,4.064 30.314,4.064 31.325,5.075 32.55,5.075 33.675,6.2 33.675,9.95 32.787,10.838 pad.@32.025,10.838 ; v1(29.625,10.625) 30.425,10.625 pad.@30.45,10.65 ; pad.@30.562,10.825 pad.@31.862,10.825 ; pad.@31.925,10.775 pad.@31.95,10.8
B12: DD1.25 XP12.15 | length 24.7
  Top Layer w0.2: DD1.25 23.432,21.73 23.975,21.187 23.975,17.567 v1(23.479,17.071)
  Bottom Layer w0.2: XP12.15@19.37,1.275 20.145,2.05 20.575,2.48 20.575,4.475 20.95,4.85 21.875,4.85 24.15,7.125 24.15,12.6 22.325,14.425 22.325,15.833 23.479,16.986 v1(23.479,17.071)
B13: DD1.26 XP12.16 | length 22
  Top Layer w0.2: v1(22.725,16.975) 22.725,17.06 23.65,17.985 23.65,20.83 23.078,21.401 DD1.26
  Bottom Layer w0.2: XP12.16@19.37,3.815 19.37,4.102 19.85,4.582 19.85,4.6 20.425,5.175 21.725,5.175 23.825,7.275 23.825,12.225 21.875,14.175 21.875,16.125 v1(22.725,16.975)
B14: DD1.27 XP12.17 | length 25.8
  Top Layer w0.2: v1(21.875,16.875) 23.325,18.325 23.325,20.45 DD1.27
  Bottom Layer w0.2: XP12.17@16.83,1.275 17.555,2 18,2.445 18,4.325 19.175,5.5 21.55,5.5 23.5,7.45 23.5,11.925 21.4,14.025 21.4,16.4 v1(21.875,16.875)
B15: DD1.28 XP12.18 | length 23
  Top Layer w0.2: v1(21,16.8) 23,18.8 23,20.041 22.371,20.669 DD1.28
  Bottom Layer w0.2: XP12.18@16.83,3.815 16.83,3.905 18.75,5.825 21.35,5.825 23.175,7.65 23.175,11.65 21,13.825 v1(21,16.8)
BOOT0: DD1.44 R6.1 XP3.1 | length 48.4
  Top Layer w0.2: DD1.44 22.875,14.164 22.875,15.725 24.4,17.25 24.4,19.633 24.448,19.681 24.448,19.873 v1(24.525,19.95)
  Top Layer w0.5: XP3.1@55.535,18.35 55.55,18.335 R6.1
  Bottom Layer w0.2: v1(24.525,19.95) 29.5,24.925 52.65,24.925 54.425,23.15 54.425,19.625 55.007,19.043 55.007,18.653 XP3.1
BOOT1: DD1.20 XP3.3 | length 32.8
  Top Layer w0.2: DD1.20 31.489,24.9 52.6,24.9 55.535,21.965 XP3.3@55.535,20.89
C13: DD1.2 R8.1 XP12.10 | length 27.7
  Top Layer w0.2: R8.1 9.55,1.825 9.8,2.075 10.475,2.075 11.24,2.84 26.015,2.84 XP12.10@26.99,3.815 ; DD1.2 25.872,12.228 26.433,11.667 v1(26.433,10.5)
  Bottom Layer w0.2: v1(26.433,10.5) 26.425,10.5 25.85,9.925 25.85,4.955 XP12.10@26.99,3.815
C14: DD1.3 XP12.12 | length 10.6
  Top Layer w0.2: DD1.3 26.225,12.574 26.881,11.918 26.881,11.627 v1(26.958,11.55)
  Bottom Layer w0.2: XP12.12 24.35,3.865 24.35,5.4 25.15,6.2 25.15,10.45 26.25,11.55 v1(26.958,11.55)
C15: DD1.4 XP12.11 | length 14.2
  Top Layer w0.2: DD1.4 26.606,12.954 27.159,12.4 27.19,12.4 27.699,11.892 v1(27.699,11.801)
  Bottom Layer w0.2: XP12.11 24.58,1.455 24.58,2.18 25.475,3.075 25.475,10.3 26.2,11.025 27.25,11.025 27.638,11.413 27.638,11.695 27.699,11.756 v1(27.699,11.801)
DM: DD1.32 R3.2 | length 2.9
  Top Layer w0.2: R3.2@18.725,20.9 18.925,20.7 19.539,20.7 DD1.32
DP: DD1.33 R4.2 | length 2.3
  Top Layer w0.2: R4.2@18.725,19.6 18.925,19.8 19.732,19.8 DD1.33
GND: C1.1 C2.1 C3.1 C4.2 C5.1 C6.1 C7.1 C8.1 C9.2 C10.1 C11.1 C12.1 C13.1 C14.1 DA2.2 DA2.4 DD1.8 DD1.23 DD1.35 DD1.47 R1.1 R6.2 R7.2 SB1.1 XP1.4 XP2.3 XP4.1 XP5.1 XP6.1 XP7.1 XP8.1 XP9.1 XP10.1 XP11.1 XP13.2 XP13.4 XP13.6 XS1.4 ZQ1.3 | length 19.1
  Top Layer w0.2: XP1.4@4.1,27.45 XP1.4 ; C2.1 9.525,5.275 10.25,6 13,6 14.49,7.49 XP2.3@14.49,7.55
  Bottom Layer w0.2: XP1.4 4.1,27.575 7.825,23.85 7.825,18.275 XS1.4@7.1,17.55
  other v1: 48.5,1 59,1 59,6.5 48.95,7.35 43.75,7.425 22.55,7.975 6.925,8.1 6.45,12.125 42.075,14.1 44.5,14.2 56.6,14.5 59,14.5 11.925,14.925 23.7,15.375 48.7,15.6 16.625,16.8 28.025,17.1 53.5,18 15,20.825 24.6,20.875 27.55,21.9 23.85,22.475 53.15,23.35 58.8,23.7 21.575,24.675 28.575,24.825 21.575,25.75 16,29 22,29 28,29 54.5,29 59,29
NetC9_1: C9.1 DD1.9 L1.2 | length 3.3
  Top Layer w0.2: DD1.9 29.318,13.75 C9.1
  Top Layer w0.25: C9.1 30.025,13.8 L1.2
NetC10_2: C10.2 DD1.5 ZQ1.1 | length 9
  Top Layer w0.2: ZQ1.1@25.45,7.65 25.733,7.933 25.733,8.083 26.05,8.4 26.25,8.4 26.6,8.75 26.6,9.925 27.425,10.75 28.224,11.549 28.224,12.019 27.795,12.448 27.792,12.448 DD1.5
  Top Layer w0.3: C10.2@24,7.825 25.275,7.825 ZQ1.1@25.45,7.65
NetC14_2: C14.2 DD1.6 ZQ1.2 | length 6.4
  Top Layer w0.2: DD1.6 28.55,12.396 28.55,11.3 27.75,10.5 ZQ1.2@27.75,9.45
  Top Layer w0.3: ZQ1.2@27.75,9.45 C14.2@29.125,9.45
NetDA1_4: DA1.4 R2.1 R4.1 | length 3.9
  Top Layer w0.2: DA1.4 15.13,21.975 15.75,21.975 16.225,21.5 16.225,21.025 R2.1 16.308,20.642 16.308,20.342 16.7,19.95 16.975,19.95 17.225,19.7 R4.1@17.225,19.6
NetDA1_6: DA1.6 R3.1 | length 3.4
  Top Layer w0.2: DA1.6 15.117,22.988 15.762,22.988 17.217,21.533 17.217,20.908 R3.1@17.225,20.9
NetHL1_C: HL1.C R7.1 | length 1.6
  Top Layer w0.4: R7.1 HL1.C 30.475,26.025 HL1.C@30.5,26
NetHL2_C: HL2.C R8.2 | length 2.4
  Top Layer w0.3: R8.2 8.05,1.843 8.25,2.043 8.643,2.043 8.8,2.2 8.8,2.65 9,2.85 9.35,2.85 9.55,3.05 HL2.C
R\S\T\: C2.2 DD1.7 R5.2 SB1.2 XP2.5 | length 48.5
  Top Layer w0.2: v1(15.575,2.225) 15.652,2.302 15.869,2.302 16.067,2.5 25.35,2.5 v1(25.675,2.175) ; DD1.7 29.025,12.629 v1@29.025,11.7
  Top Layer w0.3: C2.2 8.075,6.215 XP2.5@9.41,7.55
  Top Layer w0.4: R5.2 13.65,12.05 SB1.2@14.7,11
  Top Layer w0.5: XP2.5@9.41,7.55 9.41,7.56 11.575,9.725 14.044,9.725 14.775,10.456 SB1.2
  Bottom Layer w0.2: XP2.5 9.4,7.4 10.925,5.875 14.4,5.875 15.575,4.7 v1(15.575,2.225) ; v1(25.675,2.175) 26.025,2.525 27.375,2.525 28,3.15 28,10.625 v1@29.05,11.675
  other v1: 29.075,11.675
SHLD: C1.2 DA1.2 pad.@3,3 R1.2 XP1.5 XS1.5
  other v1: 4.5,6.5 1,8 4.5,13.5 1,14 4.5,18.5 1,20 11.725,24.1 1,25.5 5,25.5 9.075,26.6 11.7,26.6 12.95,28.95
SWCLK: DD1.37 XP2.2 | length 9.3
  Top Layer w0.2: v1(16.975,10.475) 16.975,13.214 DD1.37
  Bottom Layer w0.2: XP2.2@16.975,7.605 XP2.2@17.03,7.55
  Bottom Layer w0.3: XP2.2@16.975,7.605 v1(16.975,10.475)
SWDIO: DD1.34 XP2.4 | length 16.5
  Top Layer w0.2: XP2.4@11.95,7.55 11.95,7.625 12.85,8.525 15.55,8.525 16.325,9.3 16.325,13.1 20.825,17.6 20.825,18 DD1.34
USB_5V: C3.2 C6.2 DA1.5 DA2.1 DA2.3 XP1.1 XS1.1 | length 38.5
  Top Layer w0.2: XS1.1 9.075,18.325 9.65,18.9 11.6,18.9 14.35,21.65 14.35,22.45 14.4,22.5 DA1.5 ; 14.3,21.6 14.3,22.45 14.3,23.233 14.442,23.375 16.288,23.375 17.137,24.225 18.85,24.225 ; C6.2 18.85,24.975 18.85,24.225 ; C6.2@18.85,25 18.85,26.1 18.825,26.125 DA2.1@20.15,26.125 ; DA2.3@20.225,24.225 18.85,24.225
  Bottom Layer w0.2: XS1.1@9,17.5 8.15,18.35 8.15,24.175 5.125,27.2 5.125,28.4 5.5,28.775 9.1,28.775 XP1.1
USB_DM: DA1.1 XP1.2 XS1.2 | length 17.5
  Top Layer w0.2: v1(11.1,23.3) 11.4,23 DA1.1
  Bottom Layer w0.2: XP1.2@8.125,27.825 8,27.7 8,26.4 v1(11.1,23.3) 11.1,17.09 XS1.2@9.01,15
USB_DP: DA1.3 XP1.3 XS1.3 | length 20.2
  Top Layer w0.2: XP1.3@6.125,27.725 XP1.3@6.208,27.642 ; v1(10.5,21.8) 10.608,21.8 10.808,22 DA1.3
  Bottom Layer w0.2: XP1.3@6.275,27.875 6.275,27.45 10.5,23.225 v1(10.5,21.8) 10.5,16.95 9.525,15.975 7.975,15.975 XS1.3@7,15

## Polygon pours and split planes (outlines as drawn)
GND on Top Layer "SGND_TOP" (solid, remove dead copper, pour order 6): 60,0 60,30 15.25,30 14.8,29.55 14.8,22.1 11.725,19.025 6.913,19.025 5.8,17.912 5.8,12.1 6.538,11.362 6.538,8.513 6.538,7.935 6.913,7.599 6.913,0 14.325,0
SHLD on Top Layer "SHIELD_TOP" (solid, remove dead copper, pour order 2): 0,0 0,30 3,30 13,30 13.7,29.3 13.7,22 11.3,19.6 6.575,19.6 5.25,18.275 5.25,0
no net on Top Layer "NONET_L-01_P-001" (solid, pour order 1): 0.25,0.25
SHLD on Bottom Layer "SHIELD_BOT" (solid, remove dead copper, pour order 3): 0,0 0,30 13,30 14,29 14,23.55 12.4,21.95 8.88,21.948 5.25,18.291 5.25,0
GND on Bottom Layer "SGND_BOT" (solid, remove dead copper, pour order 4): 60,0 60,30 15.25,30 14.575,29.325 14.575,23.4 10.216,19.041 6.916,19.041 5.85,17.975 5.8,12.075 6.538,11.338 6.538,1.213 7.75,0

## Other copper
Top Layer:
  pour cut-out: 25.625,9.75 27.525,9.75 27.525,9.05 27.225,9.05 26.225,8.05 25.625,8.05
  pour cut-out: 57.775,10.1 57.775,8.075 56.9,8.075 56.9,10.1
  pour cut-out: 7.65,8.361 11.271,12 16.325,12 16.325,0.662 7.65,0.662
  pour cut-out: 14.654,9.221
Bottom Layer:
  pour cut-out: 7.525,7.7 6.6,7.7 6.6,0.5 6.7,0.4 7.525,0.4
  pour cut-out: 43.325,5.35 43.325,0.025 40.375,0.025 40.375,5.35
  pour cut-out: 10.828,6.05 19.065,6.05 16.83,3.815 11.75,3.815

## Silkscreen, mask and mechanical layers (free items; w line width, h text height)
Top Overlay:
  circle w0.2: c3,3 r2.9
  circle w0.2: c57,27 r2.9
  lines w0.15: 6.425,5.075 6.425,3.3 6.575,3.15 7.3,3.15 6.95,3.5 ; 6.975,2.825 7.275,3.125 7.275,3.15 ; 33.025,10.725 33.35,11.05 ; 33.05,10.7 33.35,10.4 ; 33.075,9.25 33.375,9.55 ; 33.075,10.725 33.575,10.725 33.75,10.9 33.75,13.4 34.1,13.75 ; 33.375,8.9 33.05,9.225 33.275,9.225 33.575,9.225 33.775,9.025 33.775,6.55 34,6.325
  lines w0.2: 32.7,15.9 37.4,15.9 37.4,29.9 32.7,29.9 32.7,15.9 ; 38,15.9 42.7,15.9 42.7,29.9 38,29.9 38,15.9 ; 39.4,0.1 44.1,0.1 44.1,14.1 39.4,14.1 39.4,0.1 ; 43.3,15.9 48,15.9 48,29.9 43.3,29.9 43.3,15.9 ; 44.6,0.1 49.3,0.1 49.3,14.1 44.6,14.1 44.6,0.1 ; 48.6,15.9 53.3,15.9 53.3,29.9 48.6,29.9 48.6,15.9 ; 50,0.1 54.7,0.1 54.7,14.1 50,14.1 50,0.1 ; 55.2,0.1 55.2,14.1 59.9,14.1 59.9,0.1 55.2,0.1
  lines w0.25: 1.1,7.2 1.1,7.8 ; 1.7,6.75 1.7,8.3 ; 2.3,6.2 2.3,8.8 ; 2.375,7.5 4.05,7.5
Bottom Overlay:
  drawing of 3652 lines, arcs and shapes, not listed
  text "USB" at 10.092,22.414 h3
  text "BOOT1" at 59.619,21.78 h2.7
  text "Controller" at 32.037,19.146 h4.5
  text "Rev 1.4" at 26.086,15.813 h3
  text "Lite" at 31.913,15.631 h4.5
  text "BOOT0" at 59.825,14.58 h2.7
  text "+" at 35.536,14.022 h3
  text "-" at 38.158,13.5 h3
  text "SDA" at 29.609,9.864 h2.7
  text "RESET" at 16.814,9.839 h3 r270
  text "SCL" at 29.525,7.739 h2.7
  text "MOSI" at 29.574,5.634 h2.7
  text "PROG" at 21.264,5.018 h3 r270
  text "GPIO" at 8.314,0.312 h3 r270
Board:
  the board outline again, w0.2

## Dimensions
0,0 to 60,0 on Dimensions
0,30 to 0,0 on Dimensions

## Text inside footprints (layer, text, board x,y; h text height)
XS1: Bottom Overlay "USB" at 1.629,13.207 h4 r270